# Altium PCB Alpha-1.1.PcbDoc
Units mm, origin at the board's own origin, x right, y up, seen from the top; angles counter-clockwise.
Board outline 50 x 81 mm, 2 copper layers (Top Layer, Bottom Layer), stack 1.671 mm thick; 65 components, 67 nets, 285 pads, 58 vias.
Unrouted connection lines stored in the file: 5.
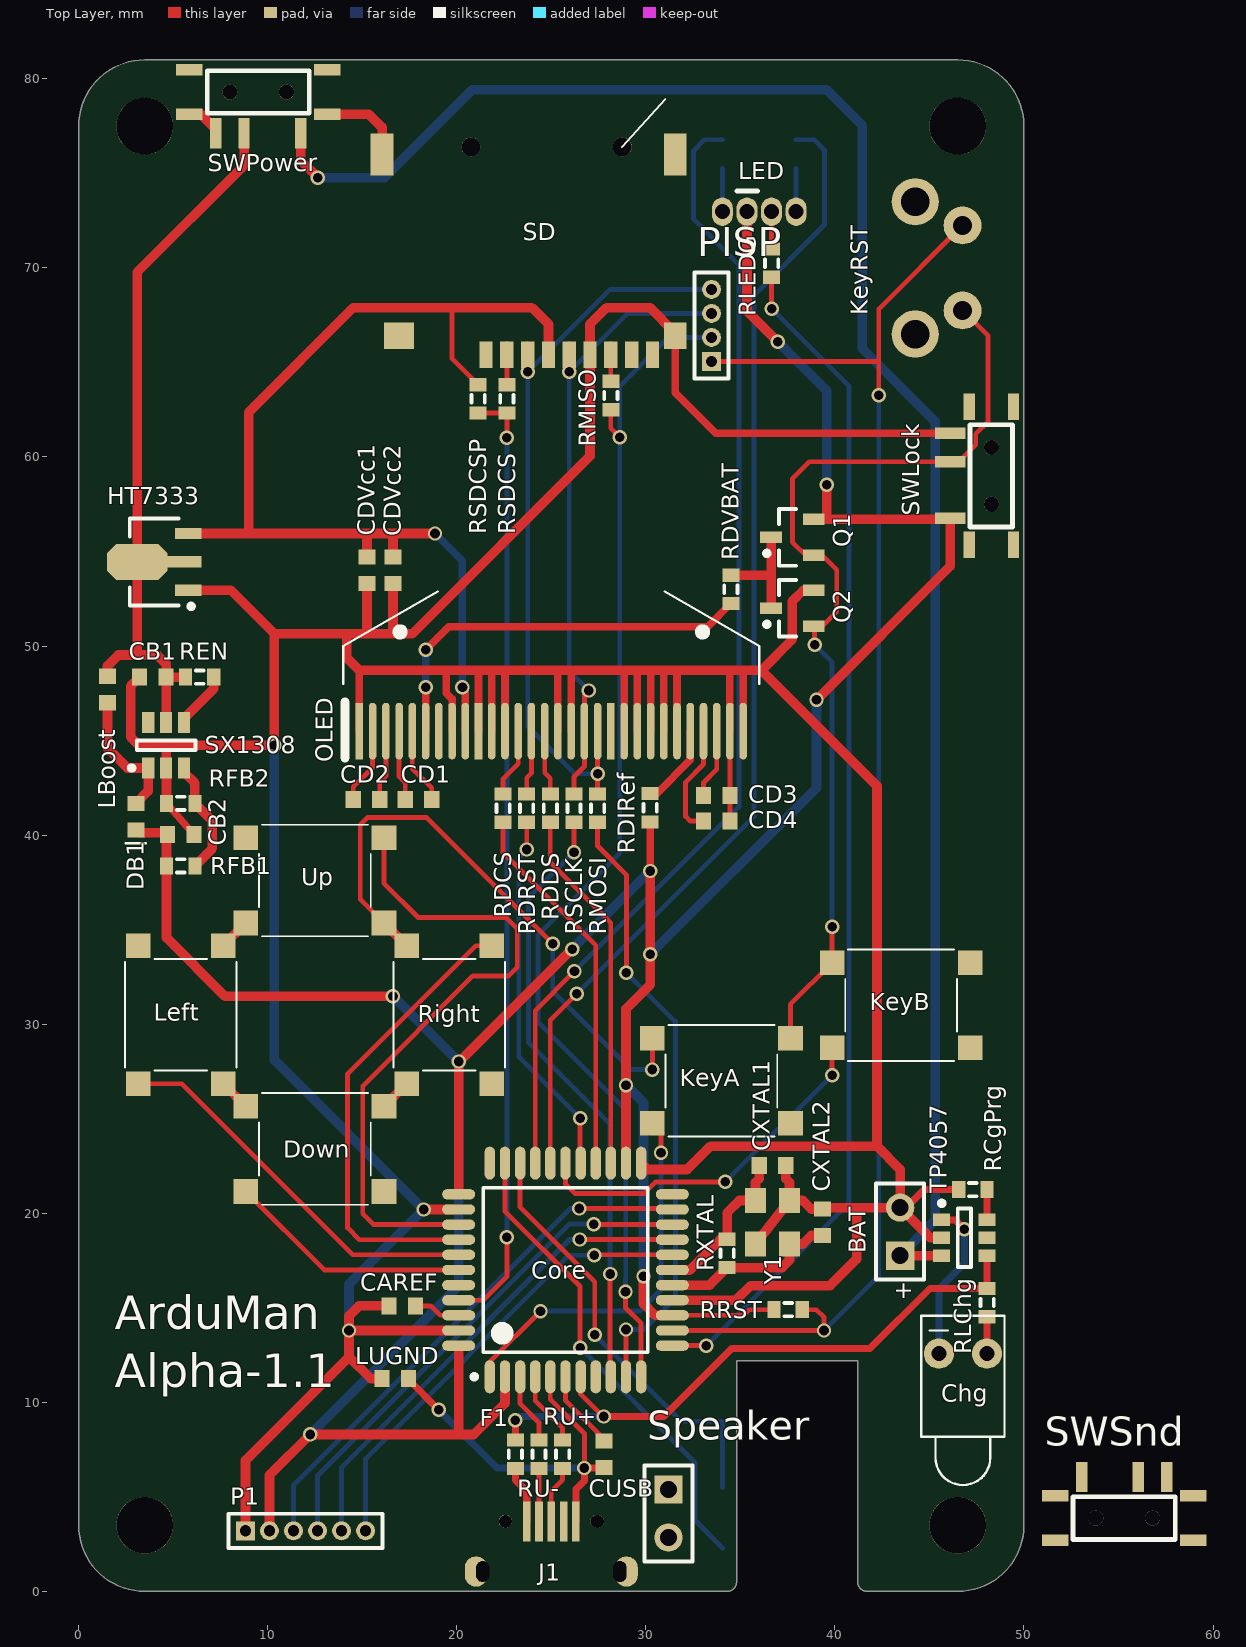
[diagram p0: Top Layer view]
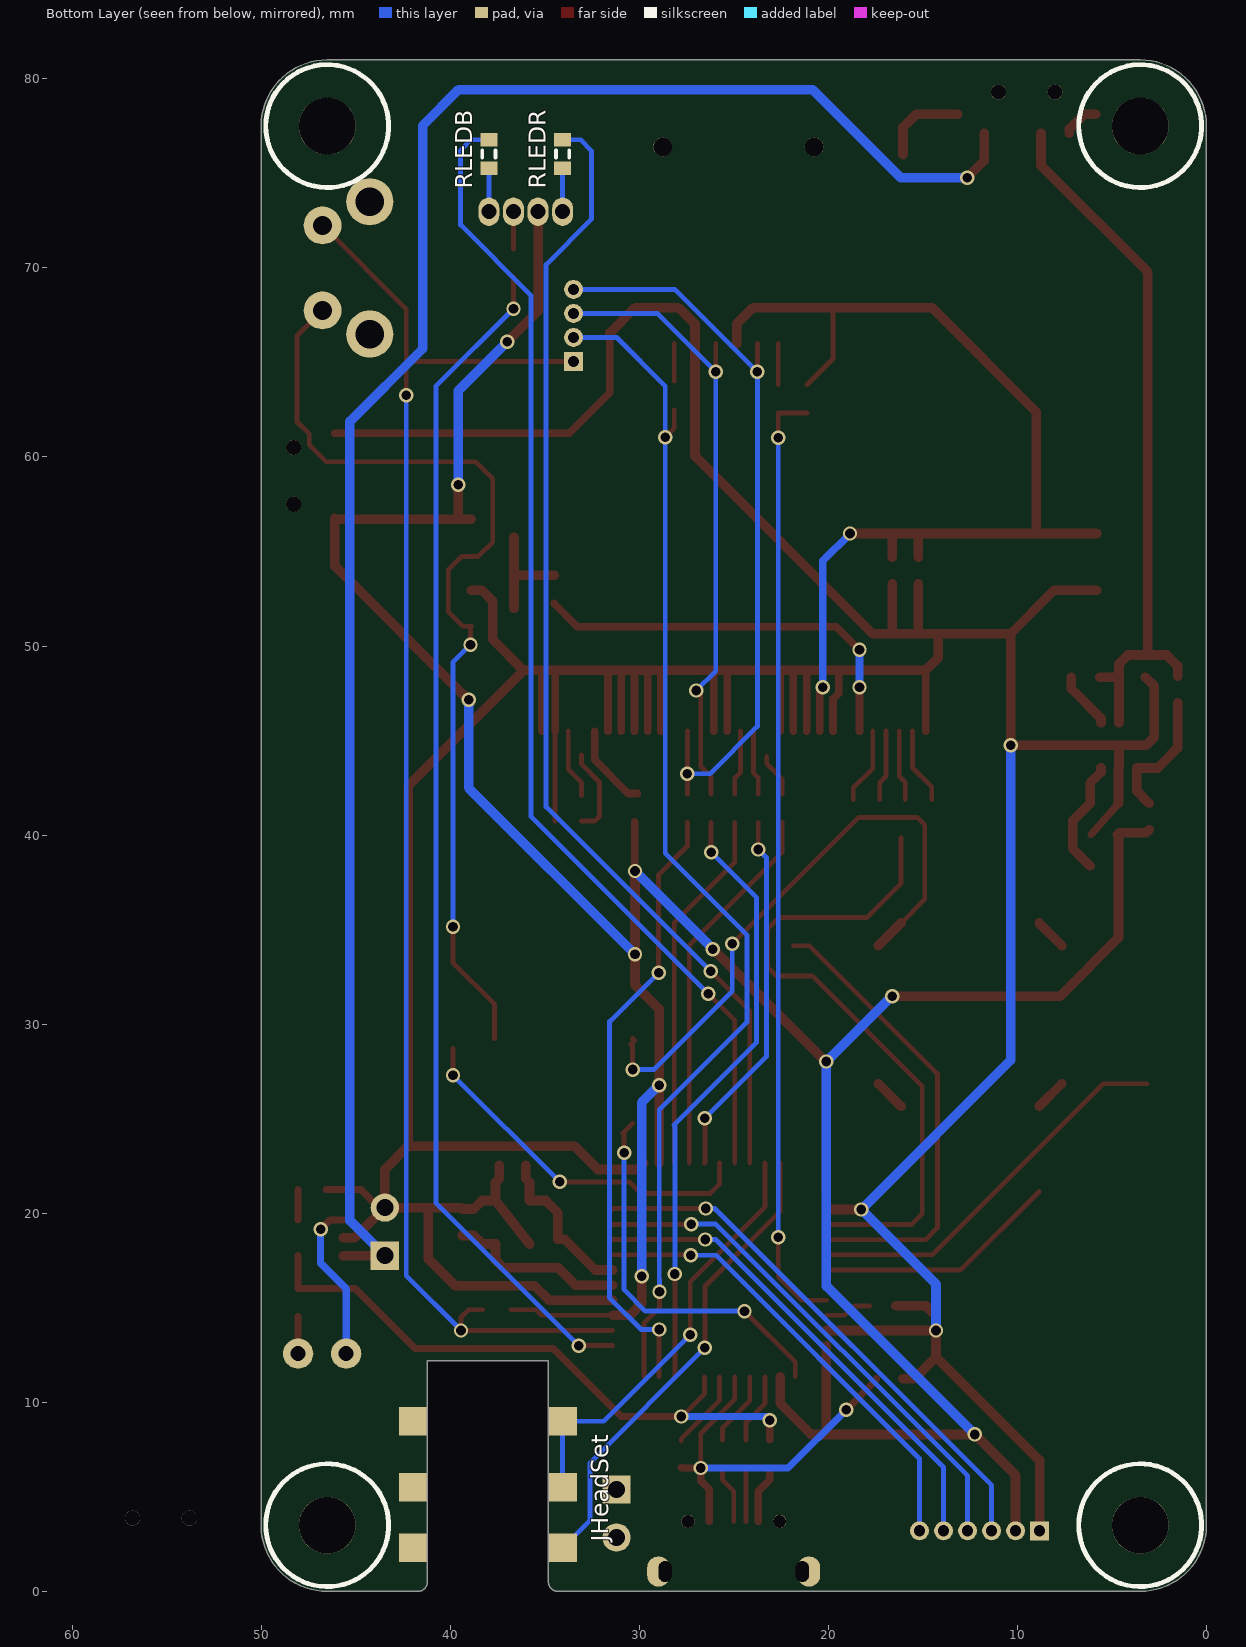
[diagram p1: Bottom Layer view, seen from below]

## Layer stack, top to bottom
Top Solder: solder mask 0.0102, Solder Resist, Dk 3.5
Top Layer: signal copper 0.0356
Dielectric 1: dielectric 1.6, FR-4, Dk 4.8
Bottom Layer: signal copper 0.0356
Bottom Solder: solder mask 0.0102, Solder Resist, Dk 3.5

## Board outline
3.5,0 cw(c3.5,3.5) 0,3.5 0,77.5 cw(c3.5,77.5) 3.5,81 46.5,81 cw(c46.5,77.5) 50,77.5 50,3.5 cw(c46.5,3.5) 46.5,0 41.7,0 cw(c41.7,0.5) 41.2,0.5 41.2,12.2 34.8,12.2 34.8,0.5 cw(c34.3,0.5) 34.3,0

## Design rules (kind name [scope] priority, off if disabled: settings)
Clearance [All] p1: gap=0.254 ignorepadtopadclearanceinfootprint=TRUE except(0: Arc-Hole Track-Hole SMDPad-THPad SMDPad-Hole THPad-Hole Via-Hole Fill-Hole Poly-Hole Region-Hole Text-Hole)
ComponentClearance [All] p1: gap=0 collisioncheckmode=3 verticalgap=0 showdistances=FALSE
HoleSize [All] p1: absolutevalues=TRUE maxlimit=10 minlimit=0.025 maxpercent=80.000 minpercent=20.000
PolygonConnect [All] p1: connectstyle=Relief reliefconductorwidth=0.254 reliefentries=4 polygonreliefangle="90 Angle" airgapwidth=0.254
RoutingVias [All] p1: holewidth=0.711 width=1.27 viastyle="Through Hole" minholewidth=0 minwidth=0.254 maxholewidth=10 maxwidth=10
SolderMaskExpansion [All] p1: expansion=0.102
UnRoutedNet [All] p1: checkbadconnections=TRUE
Width [All] p1: maxlimit=0.762 minlimit=0.254 preferedwidth=0.254
27 further rules are at their usual default settings.

## Components (designator, comment, footprint, x,y, rotation, side; value= is the part's Value field where it differs from the comment)
BAT "Battery" BAT-2 43.45,19.03 r90 top
CAREF "Cap Semi" 1608[0603] 17.125,15.1 r0 top value=100nF
CB1 "Cap Semi" 1608[0603] 3.925,48.35 r0 top value=10~47uF
CB2 "Cap Semi" 1608[0603] 5.4,40.025 r180 top value=4.7+uF
CD1 "Cap Semi" 1608[0603] 17.975,41.875 r180 top value=1uF
CD2 "Cap Semi" 1608[0603] 15.225,41.875 r180 top value=1uF
CD3 "Cap Semi" 1608[0603] 33.75,42.09 r180 top value=2.2uF
CD4 "Cap Semi" 1608[0603] 33.75,40.74 r180 top value=4.7uF
CDVcc1 "Cap Semi" 1608[0603] 15.25,54 r270 top value=1uF
CDVcc2 "Cap Semi" 1608[0603] 16.625,54 r270 top value=1uF
Chg "LED1" LED-1 46.77,12.575 r270 top locked
Core "ATmega32U4-AU" 44ML_N 25.75,17 r90 top locked
CUSB "Cap Semi" 1608[0603] 27.775,7.25 r270 top value=100pF
CXTAL1 "Cap Semi" 1608[0603] 36.7,22.525 r180 top value=22pF
CXTAL2 "Cap Semi" 1608[0603] 39.35,19.525 r270 top value=22pF
DB1 "Diode" D0603 3.025,40.975 r270 top
Down "MicroSwitch" MICROSWITCH 12.5,23.4 r180 top locked
F1 "Fuse 0.5A" J1-0603 23.1,7.25 r90 top value=0.5A
HT7333 "HT7333" SOT89N 4,54.45 r180 top
J1 "USB" USBMICROF 25,3.7 r180 top
JHeadSet "Headset" PJ-313D-2 38,3 r90 bottom locked
KeyA "MicroSwitch" MICROSWITCH 34,27 r180 top locked
KeyB "MicroSwitch" MICROSWITCH 43.5,31 r180 top locked
KeyRST "MicroSwitch" MICROSWITCH-STAND 46.75,70 r90 top
LBoost "Inductor" 1608[0603] 1.525,47.7 r90 top value=47uH
LED "RGB LED" RGBLED 34.05,72.975 r0 top
Left "MicroSwitch" MICROSWITCH 5.4,30.5 r90 top locked
LUGND "Inductor" 1608[0603] 16.75,11.25 r0 top value=31R
OLED "SSD1306" SSD1306 25,45.5 r0 top locked
P1 "MHDR1X6" MHDR1X6 8.825,3.2 r0 top locked
PISP "MHDR1X4" MHDR1X4 33.475,65.05 r90 top
Q1 "MOSFET-P" SOT23_N 37.75,55.75 r180 top locked
Q2 "MOSFET-N" SOT23_N 37.75,52 r180 top locked
RCgPrg "Res3" J1-0603 47.3,21.25 r180 top value=5K
RDCS "Res3" J1-0603 22.45,41.425 r90 top value=1K
RDDS "Res3" J1-0603 24.95,41.425 r90 top value=1K
RDIRef "Res3" J1-0603 30.225,41.45 r90 top value=800K
RDRST "Res3" J1-0603 23.7,41.425 r90 top value=1K
RDVBAT "Res3" J1-0603 34.5,53 r270 top value=1K
REN "Res3" J1-0603 6.4,48.35 r180 top value=100K
RFB1 "Res3" J1-0603 5.4,38.375 r180 top value=200K
RFB2 "Res3" J1-0603 5.4,41.675 r180 top value=27K
Right "MicroSwitch" MICROSWITCH 19.6,30.5 r270 top locked
RLChg "Res3" J1-0603 48.05,15.275 r90 top value=620R
RLEDB "Res3" J1-0603 37.95,76.025 r90 bottom value=3.0K
RLEDG "Res3" J1-0603 36.65,70.25 r270 top value=3.25K
RLEDR "Res3" J1-0603 34.05,76.025 r90 bottom value=1.7K
RMISO "Res3" J1-0603 28.15,63.25 r90 top value=1K
RMOSI "Res3" J1-0603 27.45,41.425 r90 top value=1K
RRST "Res3" J1-0603 37.525,14.9 r0 top value=100K
RSCLK "Res3" J1-0603 26.2,41.425 r90 top value=1K
RSDCS "Res3" J1-0603 22.65,63.075 r270 top value=1K
RSDCSP "Res3" J1-0603 21.125,63.075 r90 top value=100K
RU+ "Res3" J1-0603 25.6,7.25 r90 top value=22R
RU- "Res3" J1-0603 24.35,7.25 r90 top value=22R
RXTAL "Res3" J1-0603 34.3,17.875 r270 top value=1M
SD "HY-TF1007B" HY-TF1007B 30.35,66.7 r180 top locked
Speaker "Header 2" HDR1X2 31.2,5.39 r270 top
SWLock "MSK-1103_W13" MSK-1103_W13 48.275,59 r90 top
SWPower "MSK-1103_W13" MSK-1103_W13 9.5,79.3 r180 top
SWSnd "MSK-1103_W13" MSK-1103_W13 55.3,3.875 r0 top
SX1308 "SX1308" SOT23-6_N 4.625,44.75 r90 top
TP4057 "TP4057" SOT23-6_L 46.85,18.7 r0 top
Up "MicroSwitch" MICROSWITCH 12.5,37.6 r0 top locked
Y1 "Quartz Oscillator" 3225QUARTZ_CRYSTAL 35.8,20.675 r270 top

## Footprints (in the part's own frame and the unit in brackets; to place one, negate y for a bottom-side part, rotate by r counter-clockwise, add the part's x,y. Pads: shape width x height; smd on the part's side, far side on the other; paste and mask are expansions set on the pad)
44ML_N [mm] "Thin QFP, 44-Leads, Body 10x10mm, Pitch 0.8mm, IPC Medium Density"
  oval 1.75x0.55 smd: 1(-5.65,4) 2(-5.65,3.2) 3(-5.65,2.4) 4(-5.65,1.6) 5(-5.65,0.8) 6(-5.65,0) 7(-5.65,-0.8) 8(-5.65,-1.6) 9(-5.65,-2.4) 10(-5.65,-3.2) 11(-5.65,-4) 23(5.65,-4) 24(5.65,-3.2) 25(5.65,-2.4) 26(5.65,-1.6) 27(5.65,-0.8) 28(5.65,0) 29(5.65,0.8) 30(5.65,1.6) 31(5.65,2.4) 32(5.65,3.2) 33(5.65,4)
  oval 0.55x1.75 smd: 12(-4,-5.65) 13(-3.2,-5.65) 14(-2.4,-5.65) 15(-1.6,-5.65) 16(-0.8,-5.65) 17(0,-5.65) 18(0.8,-5.65) 19(1.6,-5.65) 20(2.4,-5.65) 21(3.2,-5.65) 22(4,-5.65) 34(4,5.65) 35(3.2,5.65) 36(2.4,5.65) 37(1.6,5.65) 38(0.8,5.65) 39(0,5.65) 40(-0.8,5.65) 41(-1.6,5.65) 42(-2.4,5.65) 43(-3.2,5.65) 44(-4,5.65)
  silkscreen extent -5.77,-4.35 4.35,4.95, body extent -5,-5 5,5, height 1.2
1608[0603] [mm] "Chip Capacitor, Body 1.6x0.8mm, IPC High Density"
  rect 0.8x0.9 smd: 1(-0.7,0) 2(0.7,0)
  body extent -0.87,-0.48 0.87,0.48, height 1.3
3225QUARTZ_CRYSTAL [mm]
  rect 1.3x1.1 smd: 1(0,0) 2(2.3,0) 3(2.3,1.8) 4(0,1.8)
  body extent -0.45,-0.35 2.75,2.15, height 0.6
BAT-2 [mm] "Battery; 2 Leads"
  rect 1.5x1.5 hole 0.9: 1(-1.27,0)
  round 1.5 hole 0.9: 2(1.27,0)
  silkscreen extent -2.54,-1.27 2.54,1.27
D0603 [mm] "Diode, Body 1.6x0.8mm"
  rect 0.8x0.9 smd: 1(-0.7,0) 2(0.7,0)
  silkscreen extent 1.4,-0.52 1.4,0.53, body extent -0.87,-0.48 0.87,0.48, height 1.3
HDR1X2 [mm] "Connector; Header; 2 Position"
  rect 1.5x1.5 hole 0.9: 1(0,0)
  round 1.5 hole 0.9: 2(2.54,0)
  silkscreen extent -1.27,-1.27 3.81,1.27
HY-TF1007B [mm] "Micro SD Card Slot"
  round 1 hole 1 unplated mask+0: 0(1.6,-9.7) 0(9.6,-9.7)
  rect 0.7x1.4 smd: 1(8.8,1.3) 2(7.7,1.3) 3(6.6,1.3) 4(5.5,1.3) 5(4.4,1.3) 6(3.3,1.3) 7(2.2,1.3) 8(1.1,1.3) 9(0,1.3)
  rect 1.2x1.4 smd: 10(-1.2,0.3)
  rect 1.2x2.2 smd: 10(-1.2,-9.3) 10(14.3,-9.3)
  rect 1.6x1.4 smd: 10(13.4,0.3)
  body extent -0.8,-16.3 13.9,1.3, height 1.85
J1-0603 [mm] "Chip Resistor, Body 1.6x0.8mm, IPC High Density"
  rect 0.7x0.9 smd: 1(-0.75,0) 2(0.75,0)
  silkscreen extent -0.2,-0.35 0.2,0.35, body extent -0.85,-0.48 0.85,0.48, height 0.9
LED-1 [mm] "LED; 2 Leads"
  round 1.6 hole 0.8: 1(0,1.27) 2(0,-1.27)
  silkscreen extent -2,-2.2 6.95,2.2
MHDR1X4 [mm] "Connector; Header; 4 Position"
  rect 1x1 hole 0.6: 1(0,0)
  round 1 hole 0.6: 2(1.27,0) 3(2.54,0) 4(3.81,0)
  silkscreen extent -0.9,-0.9 4.71,0.9
MHDR1X6 [mm] "Connector; Header; 6 Position"
  rect 1x1 hole 0.6: 1(0,0)
  round 1 hole 0.6: 2(1.27,0) 3(2.54,0) 4(3.81,0) 5(5.08,0) 6(6.35,0)
  silkscreen extent -0.9,-0.9 7.25,0.9
MICROSWITCH [mm] "Micro Switch"
  rect 1.3x1.3 smd: 1(-3.65,2.25) 1(3.65,2.25) 2(-3.65,-2.25) 2(3.65,-2.25)
  silkscreen extent -2.95,-2.95 2.95,2.95, body extent -4,-3 4,3, height 6
MICROSWITCH-STAND [mm] "Micro Switch, Standing"
  round 2.5 hole 1.5: 0(-3.5,2.5) 0(3.5,2.5)
  round 2 hole 1: 1(-2.25,0) 2(2.25,0)
  body extent -4.25,-5 4.25,4.45, height 7
MSK-1103_W13 [mm] "Switch"
  round 0.8 hole 0.8 unplated mask+0: 0(-1.5,0) 0(1.5,0)
  rect 0.6x1.6 smd: 1(-2.25,2.175) 2(0.75,2.175) 3(2.25,2.175)
  rect 1.4x0.6 smd: 4(-3.65,-1.175) 4(-3.65,1.175) 4(3.65,-1.175) 4(3.65,1.175)
  silkscreen extent -2.7,-1.12 2.7,1.12, body extent -3.9,-3.88 3.9,2.37, height 1.4
PJ-313D-2 [mm] "Headphone Jack"
  rect 1.5x1.5 smd: 1(6,-3.95) 1(6,3.95) 2(2.5,-3.95) 2(2.5,3.95) 3(-0.7,-3.95) 3(-0.7,3.95)
  body extent -5,-4.2 9,4.2, height 5
RGBLED [mm] "RGB LED"
  oval 1.1x1.5 hole 0.8: 1(0,0) 2(1.3,0) 3(2.6,0) 4(3.9,0)
  silkscreen extent 0.77,1.1 1.85,1.1
SOT23-6_L [mm] "SOT23, 6-Leads, Body 2.9x1.6mm, Pitch 0.95mm, Lead Span 2.7mm, IPC High Density"
  rect 0.9x0.65 smd: 1(-1.2,0.95) 2(-1.2,0) 3(-1.2,-0.95) 4(1.2,-0.95) 5(1.2,0) 6(1.2,0.95)
  silkscreen extent -1.32,-1.55 0.35,1.95, body extent -0.9,-1.55 0.9,1.55, height 1.45
SOT23-6_N [mm] "SOT23, 6-Leads, Body 2.9x1.6mm, Pitch 0.95mm, Lead Span 2.7mm, IPC Medium Density"
  rect 1.1x0.65 smd: 1(-1.2,0.95) 2(-1.2,0) 3(-1.2,-0.95) 4(1.2,-0.95) 5(1.2,0) 6(1.2,0.95)
  silkscreen extent -1.32,-1.55 0.25,1.95, body extent -0.9,-1.55 0.9,1.55, height 1.45
SOT23_N [mm] "SOT23, 3-Leads, Body 2.9x1.3mm, Pitch 0.95mm, Lead Span 2.3mm - Reverse Pinning, IPC Medium Density"
  rect 1.15x0.6 smd: 1(1.125,0) 2(-1.125,-0.95) 3(-1.125,0.95)
  silkscreen extent -0.2,-1.5 1.47,1.5, body extent -0.7,-1.5 0.7,1.5, height 1.1
SOT89N [mm] "SOT89, 3-Leads, Body 4.5x2.4 mm, Pitch 1.5mm, Lead Span 4.1mm, IPC Medium Density"
  rect 1.4x0.6 smd: 1(-1.8,1.5) 3(-1.8,-1.5)
  rect 1.8x0.6 smd: 2(-1.6,0)
  oct 3.2x1.9 smd: 2(0.9,0)
  silkscreen extent -2.07,-2.3 1.3,2.47, body extent -1.3,-2.3 1.3,2.3, height 1.6
SSD1306 [mm] "OLED Controller"
  rect 0.4x3 smd: 1(-10.15,0) 10(-3.85,0) 20(3.15,0)
  oval 0.4x3 smd: 2(-9.45,0) 3(-8.75,0) 4(-8.05,0) 5(-7.35,0) 6(-6.65,0) 7(-5.95,0) 8(-5.25,0) 9(-4.55,0) 11(-3.15,0) 12(-2.45,0) 13(-1.75,0) 14(-1.05,0) 15(-0.35,0) 16(0.35,0) 17(1.05,0) 18(1.75,0) 19(2.45,0) 21(3.85,0) 22(4.55,0) 23(5.25,0) 24(5.95,0) 25(6.65,0) 26(7.35,0) 27(8.05,0) 28(8.75,0) 29(9.45,0) 30(10.15,0)
  silkscreen extent -11,-1.4 11,7.39
USBMICROF [mm] "USB Micro Slot Female"
  rrect100% 1.2x1.6 hole 0.7 slot 1.1 at 90 deg copper offset -0.35,0: 0(-3.625,2.65)
  round 0.7 hole 0.7 mask+0: 0(-2.425,0) 0(2.425,0)
  rrect100% 1.2x1.6 hole 0.7 slot 1.1 at 90 deg copper offset 0.35,0: 0(3.625,2.65)
  rect 0.4x2.1 smd: 1(1.3,0) 2(0.65,0) 3(0,0) 4(-0.65,0) 5(-1.3,0)
  body extent -3.8,-0.26 3.8,4.8, height 2.6

## Part data
CAREF CB1 CB2 CD1 CD2 CD3 CD4 CDVcc1 CDVcc2 CUSB CXTAL1 CXTAL2: "Capacitor (Semiconductor SIM Model)", LatestRevisionDate=29-May-2009, LatestRevisionNote="IPC-7351 Footprint Added.", PackageDescription="Chip Capacitor", PackageReference=C1206, Published=8-Jun-2000, Publisher="Altium Limited"
Chg: "Typical RED GaAs LED", LatestRevisionDate=08-Jul-2005, LatestRevisionNote="Mech Layer 1 removed.", PackageDescription="LED; 2 Leads", PackageReference=LED-1, Published=8-Jun-2000, Publisher="Altium Limited"
Core: "8-bit AVR Microcontroller, 2.7-5.5V, 32KB Flash, 2.5KB EEPROM, 1KB SRAM, USB Controller, 44-pin TQFP, Industrial Grade (-40癈 to 85癈)", Supplier Part Number 1=ATMEGA32U4-AU-ND, ComponentLink1Description="Manufacturer Link", ComponentLink1URL=http://www.atmel.com/products/avr/default.asp?, ComponentLink2Description="ATmega16U4/32U4 Datasheet", ComponentLink2URL=http://www.atmel.com/dyn/resources/prod_documents/doc7766.pdf, ComponentLink3Description="ATmega16U4 ATmega32U4 Summary", ComponentLink3URL=http://www.atmel.com/dyn/resources/prod_documents/7766S.pdf, ComponentLink4Description="Atmel.com Home", ComponentLink4URL=http://www.atmel.com, DatasheetVersion="revD, Jan-2009", PackageDescription="44-Pin Plastic Thin Quad Flat Pack, 10 x 10 x 1.0 mm Body, 0.8 mm Pitch (TQFP)", PackageReference=44ML, PackageVersion="rev.G, Jul-2007", Published=1-Apr-2010, Publisher="Altium Limited", Supplier 1=Digi-Key, Supplier 2=Farnell, Supplier 3=Mouser, Supplier Part Number 2=1748525, Supplier Part Number 3=556-ATMEGA32U4-AU
DB1: "Default Diode", Code_JEDEC=DO-214-AB, LatestRevisionDate=17-Jul-2002, LatestRevisionNote="Re-released for DXP Platform.", PackageDescription="DO-214-AB/SMC; 2 C-Bend Leads; Body 7.9 x 5.9 mm, inc. leads (LxW)", PackageReference=SMC, PackageVersion=Sep-1996, Published=8-Jun-2000, Publisher="Altium Limited"
Down KeyA KeyB KeyRST Left Right Up: "Micro Switch"
F1: library part Res3, "Fuse", LatestRevisionDate=29-May-2009, LatestRevisionNote="IPC-7351 Footprint Added.", PackageDescription="Chip Resistor", PackageReference=J1-0603, Published=8-Jun-2000, Publisher="Altium Limited"
HT7333: "3.3v LDO Regulator"
J1: library part USBMicroF, "USB Micro Female Jack"
JHeadSet: library part PJ-313D, "3.5mm Headset Jack"
LED: library part RGBLED
OLED: "OLED Controller"
P1: "Header, 6-Pin", LatestRevisionDate=17-Jul-2002, LatestRevisionNote="Re-released for DXP Platform.", Publisher="Altium Limited"
PISP: "Header, 4-Pin", LatestRevisionDate=17-Jul-2002, LatestRevisionNote="Re-released for DXP Platform.", Publisher="Altium Limited"
Q1: "P-Channel MOSFET", LatestRevisionDate=17-Jul-2002, LatestRevisionNote="Re-released for DXP Platform.", PackageDescription="TO, Flat Index; 3 In-Line, Axial Leads; Body Dia. 4.6mm; Lead Dia. 0.5 mm (max)", PackageReference=E3, PackageVersion=1995/1996, Published=8-Jun-2000, Publisher="Altium Limited"
Q2: "N-Channel MOSFET", LatestRevisionDate=17-Jul-2002, LatestRevisionNote="Re-released for DXP Platform.", PackageDescription="TO, Flat Index; 3 In-Line, Axial Leads; Body Dia. 4.6mm; Lead Dia. 0.5 mm (max)", PackageReference=E3, PackageVersion=1995/1996, Published=8-Jun-2000, Publisher="Altium Limited"
RCgPrg RDCS RDDS RDIRef RDRST RDVBAT REN RFB1 RFB2 RLChg RLEDB RLEDG RLEDR RMISO RMOSI RRST RSCLK RSDCS RSDCSP RU+ RU- RXTAL: "Resistor", LatestRevisionDate=29-May-2009, LatestRevisionNote="IPC-7351 Footprint Added.", PackageDescription="Chip Resistor", PackageReference=J1-0603, Published=8-Jun-2000, Publisher="Altium Limited"
SD: "Micro SD Card Slot"
Speaker: "Header, 2-Pin", LatestRevisionDate=17-Jul-2002, LatestRevisionNote="Re-released for DXP Platform.", Publisher="Altium Limited"
SWLock SWPower SWSnd: "Switch"
SX1308: "Boost DC-DC"
Y1: library part OSC3225
LBoost LUGND: Code_IEC=1005, Code_JEITA=0402, LatestRevisionDate=29-May-2009, LatestRevisionNote="IPC-7351 Footprint Added.", PackageDescription="Chip Inductor", PackageReference=0402-A, Published=8-Jun-2000, Publisher="Altium Limited"

## Free pads (board coordinates)
  round 3 hole 3 unplated mask+0: 0(3.5,3.5) 0(3.5,77.5) 0(46.5,3.5) 0(46.5,77.5)

## Via types
v1: diameter 0.762, hole 0.508, Top Layer to Bottom Layer, tented both sides, 58 vias

## Nets (pads, with @x,y where several pads share a name; then routed paths per layer and width w, separated by ;. In a path a pad name is that pad's centre, name@x,y a point inside that pad or via, vN(x,y) a via of type N, cw(c..) or ccw(c..) an arc to the next point about the centre after c; other vN are vias at no path point)
Bat+: BAT.1 SWPower.1 TP4057.3 | length 98.6
  Top Layer w0.254: BAT.1 BAT.1@43.46,17.75
  Top Layer w0.508: SWPower.1 11.75,75.675 v1(12.65,74.775) ; BAT.1@43.46,17.75 TP4057.3
  Bottom Layer w0.508: v1(12.65,74.775) 16.175,74.775 20.825,79.425 39.55,79.425 41.45,77.525 41.45,65.725 45.3,61.875 45.3,19.61 BAT.1
DPad-Down: Core.39 Down.1 | length 13
  Top Layer w0.254: Down.1@8.85,21.15 13,17 Core.39
DPad-Left: Core.38 Left.1 | length 20.7
  Top Layer w0.254: Left.1@3.15,26.85 5.45,26.85 14.5,17.8 Core.38
DPad-Right: Core.37 Right.1 | length 24.7
  Top Layer w0.254: Core.37 14.85,18.6 14.225,19.225 14.225,27.375 21,34.15 Right.1@21.85,34.15
DPad-Up: Core.36 Up.1 | length 35.3
  Top Layer w0.254: Up.1@16.15,39.85 16.15,37.45 17.95,35.65 22.6,35.65 23.2,35.05 23.2,33 22.75,32.55 20.85,32.55 15.025,26.725 15.025,19.975 15.6,19.4 Core.36
GND: BAT.2 CAREF.1 CB1.1 CB2.1 CD3.1 CD4.1 CDVcc1.2 CDVcc2.2 Core.15 Core.23 Core.35 Core.43 CXTAL1.1 CXTAL2.1 HT7333.1 LUGND.1 OLED.1 OLED.8 OLED.10 OLED.11 OLED.12 OLED.16 OLED.17 OLED.21 OLED.22 OLED.23 OLED.24 OLED.25 OLED.29 OLED.30 P1.1 Q2.2 RCgPrg.2 RFB2.2 SD.6 SD.10 SWLock.3 SWPower.3 SWPower.4 SX1308.2 TP4057.2 Y1.2 Y1.4 | length 307.3
  Top Layer w0.254: SWPower.3@7.219,77.156 SWPower.3 ; CD4.1 CD3.1 OLED.29
  Top Layer w0.381: RFB2.2 CB2.1 ; BAT.2 43.775,20.3 44.725,21.25 RCgPrg.2
  Top Layer w0.4: OLED.1 14.85,48.716 ; 19.454,48.662 19.454,47.494 19.75,47.198 OLED.8 ; OLED.10 21.15,48.716 ; OLED.11 21.85,48.716 ; OLED.12 22.55,48.716 ; OLED.16 25.35,48.716 ; OLED.17 26.05,48.716 ; OLED.21 28.85,48.716 ; OLED.22 29.55,48.716 ; OLED.23 30.25,48.716 ; OLED.24 30.95,48.716 ; SD.10@31.55,66.4 31.55,63.4 33.7,61.25 SWLock.3 ; OLED.25 31.65,48.716 ; OLED.29 34.45,48.716 ; OLED.30 35.15,48.716
  Top Layer w0.508: CB1.1 2.75,47.875 2.75,45.2 3.2,44.75 4.625,44.75 ; SX1308.2 4.625,44.75 ; RFB2.2 SX1308.2@4.65,43.525 ; HT7333.1 8.05,52.95 10.35,50.65 ; SWPower.4@5.85,78.125 6.475,78.125 7.25,77.35 SWPower.3 ; P1.1 8.825,6.925 14.3,12.4 ; SWPower.4@13.15,78.125 15.35,78.125 16.05,77.425 SD.10@16.05,76 ; CDVcc1.2 15.25,50.65 ; LUGND.1 15.45,11.25 14.3,12.4 ; CAREF.1 14.825,15.1 14.3,14.575 v1(14.3,13.8) ; CDVcc2.2 16.625,50.65 ; v1(18.25,20.2) Core.35 ; 19.454,48.662 19.508,48.716 ; Core.43 v1(14.3,13.8) ; Core.23 30.088,22.312 32.187,22.312 33.425,23.55 42.225,23.55 ; Core.15 34.775,15.4 35.55,16.175 39.75,16.175 41.15,17.575 41.15,20.3 ; SD.10@31.55,66.4 31.55,66.568 30.218,67.9 27.925,67.9 27.05,67.025 SD.6 27.05,60.05 17.65,50.65 16.625,50.65 ; Y1.2 Y1.4 ; CXTAL1.1 37.4,21.825 37.6,21.625 Y1.4 ; Q2.2 38.325,52.95 37.75,52.375 37.75,50.358 36.109,48.716 ; TP4057.2 45.05,18.7 BAT.2 ; 4.625,44.75 v1(10.35,44.75) 10.35,50.65 ; 10.35,50.65 14.175,50.65 ; 14.175,50.65 14.175,49.391 14.85,48.716 19.508,48.716 ; 14.175,50.65 15.25,50.65 ; 14.3,12.4 v1(14.3,13.8) ; 15.25,50.65 16.625,50.65 ; 19.508,48.716 21.15,48.716 21.85,48.716 22.55,48.716 25.35,48.716 26.05,48.716 28.85,48.716 29.55,48.716 30.25,48.716 30.95,48.716 31.65,48.716 34.45,48.716 35.15,48.716 36.109,48.716 ; 36.109,48.716 42.225,42.6 42.225,23.55 ; Y1.4 38.3,20.675 38.75,20.225 CXTAL2.1 39.425,20.3 41.15,20.3 ; 41.15,20.3 BAT.2 ; 42.225,23.55 43.45,22.325 BAT.2
  Bottom Layer w0.508: v1(10.35,44.75) 10.35,28.1 v1(18.25,20.2) 14.3,16.25 v1(14.3,13.8)
GND-LOCK: Down.2 KeyA.2 KeyB.2 KeyRST.1 Left.2 Q1.3 Q2.3 Right.2 SWLock.2 Up.2 | length 88.5
  Top Layer w0.254: Up.2@16.15,35.35 14.9,36.6 14.9,40.55 15.275,40.925 18.403,40.925 v1(25.076,34.252) ; v1(30.35,27.6) 30.35,28.85 30.45,28.95 30.25,29.15 KeyA.2@30.35,29.25 ; KeyA.2@37.65,29.25 37.65,31.05 39.85,33.25 v1(39.85,35.15) ; v1(38.925,50.075) 38.925,51 Q2.3 39.325,51.05 40.1,51.825 40.1,54.025 39.388,54.737 38.513,54.737 37.75,55.5 37.75,58.85 38.65,59.75 SWLock.2 46.55,59.75 47.45,60.65 47.45,61.225 48.1,61.875 48.1,66.4 KeyRST.1
  Top Layer w0.508: Left.2@7.65,26.85 Down.2@8.85,25.65 ; Left.2@7.65,34.15 Up.2@8.85,35.35 ; Down.2@16.15,25.65 Right.2@17.35,26.85 ; Up.2@16.15,35.35 Right.2@17.35,34.15
  Bottom Layer w0.254: v1(25.076,34.252) 25.076,31.749 29.225,27.6 v1(30.35,27.6) ; v1(38.925,50.075) 39.85,49.15 v1(39.85,35.15)
Key-A: Core.1 KeyA.1 | length 20.5
  Top Layer w0.254: Core.1 21.75,12.145 v1(24.43,14.825) ; KeyA.1@30.35,24.75 30.85,24.25 30.8,24.2 30.802,24.199 v1(30.802,23.201)
  Bottom Layer w0.254: v1(24.43,14.825) 29.675,14.825 30.802,15.952 v1(30.802,23.201)
Key-B: Core.28 KeyB.1 | length 19.4
  Top Layer w0.254: Core.28 25.75,21.55 26.25,21.05 29.922,21.05 30.528,21.656 v1(34.206,21.656) ; v1(39.85,27.3) KeyB.1@39.85,28.711
  Bottom Layer w0.254: v1(34.206,21.656) v1(39.85,27.3)
LED-Blue: Core.29 RLEDB.2 | length 61.3
  Top Layer w0.254: Core.29 24.95,30.215 v1(26.35,31.615)
  Bottom Layer w0.254: v1(26.35,31.615) 35.725,40.99 35.725,68.55 39.45,72.275 39.45,76.225 38.9,76.775 RLEDB.2
LED-Green: Core.12 RLEDG.2 | length 63.7
  Top Layer w0.254: Core.12 31.425,12.975 31.45,13 v1(33.2,13) ; 36.65,68.375 v1(36.65,67.85) RLEDG.2
  Bottom Layer w0.254: v1(33.2,13) 40.75,20.55 40.75,63.75 v1(36.65,67.85)
LED-Red: Core.30 RLEDR.2 | length 60.8
  Top Layer w0.254: Core.30 24.15,30.715 v1(26.225,32.79)
  Bottom Layer w0.254: v1(26.225,32.79) 34.925,41.49 34.925,70.175 32.525,72.575 32.525,76.2 33.1,76.775 RLEDR.2
MISO: Core.11 PISP.2 RMISO.1 | length 64.6
  Top Layer w0.254: RMISO.1 28.15,61.525 v1(28.625,61.05) ; v1(28.925,15.85) 28.925,15 29.75,14.175 Core.11
  Bottom Layer w0.254: v1(28.925,15.85) 28.925,16.497 28.937,16.509 28.937,25.463 24.3,30.1 24.3,34.725 28.625,39.05 v1(28.625,61.05) ; PISP.2 31.195,66.32 28.625,63.75 v1@28.625,61.3 ; v1(28.625,61.05) 28.375,61.05 v1@28.625,61.3 ; v1(28.625,61.05) v1@28.625,61.3
MISO_R: RMISO.2 SD.7 | length 2
  Top Layer w0.254: RMISO.2 SD.7@28.15,66
MOSI: Core.10 RMOSI.1 | length 32.7
  Top Layer w0.254: RMOSI.1 27.45,39.425 28.975,37.9 v1(28.975,32.725) ; Core.10 v1(28.95,13.85)
  Bottom Layer w0.254: v1(28.95,13.85) 29.9,13.85 31.564,15.514 31.564,30.136 v1(28.975,32.725)
MOSI_R: OLED.19 PISP.4 RMOSI.2 SD.3 | length 39.8
  Top Layer w0.254: v1(23.75,64.5) SD.3 SD.3@23.75,66 ; RMOSI.2 OLED.19
  Bottom Layer w0.254: v1(27.45,43.25) 26.25,43.25 23.75,45.75 v1(23.75,64.5) 28.11,68.86 PISP.4
NetCAREF_2: CAREF.2 Core.42 | length 2.5
  Top Layer w0.254: CAREF.2 18.625,15.1 19.125,14.6 Core.42
NetCD1_1: CD1.1 OLED.5 | length 4
  Top Layer w0.254: OLED.5 17.65,43.518 18.675,42.493 CD1.1
NetCD1_2: CD1.2 OLED.4 | length 3.8
  Top Layer w0.254: OLED.4 16.95,43.1 17.275,42.775 CD1.2
NetCD2_1: CD2.1 OLED.3 | length 3.8
  Top Layer w0.254: CD2.1 15.925,42.8 16.25,43.125 OLED.3
NetCD2_2: CD2.2 OLED.2 | length 4
  Top Layer w0.254: CD2.2 14.525,42.55 15.55,43.575 OLED.2
NetCD3_2: CD3.2 OLED.28 | length 3.7
  Top Layer w0.254: CD3.2 33.05,42.775 33.75,43.475 OLED.28
NetCD4_2: CD4.2 OLED.27 | length 4.7
  Top Layer w0.254: CD4.2 32.35,40.74 32.1,40.99 32.1,42.8 33.05,43.75 OLED.27@33.05,44.24
NetChg_1: Chg.1 RLChg.1 | length 1.9
  Top Layer w0.381: Chg.1@48.05,12.585 RLChg.1
NetChg_2: Chg.2 TP4057.1 | length 8.5
  Top Layer w0.381: TP4057.1 46.35,19.65 v1(46.85,19.15)
  Bottom Layer w0.381: Chg.2 45.5,16 46.85,17.35 v1(46.85,19.15)
NetCore_16: Core.16 CXTAL2.2 RXTAL.2 Y1.3 | length 9.5
  Top Layer w0.508: Core.16 33.375,16.2 RXTAL.2 37.2,17.125 37.6,17.525 Y1.3 38.3,18.375 38.75,18.825 CXTAL2.2
NetCore_17: Core.17 CXTAL1.2 RXTAL.1 Y1.1 | length 8.7
  Top Layer w0.508: Core.17 32.325,17 33.95,18.625 RXTAL.1 34.3,20.025 34.95,20.675 Y1.1 35.8,21.625 36,21.825 CXTAL1.2
NetDB1_1: DB1.1 LBoost.1 SX1308.1 | length 7.1
  Top Layer w0.508: LBoost.1 1.525,44.6 2.575,43.55 SX1308.1 3.675,42.325 DB1.1
NetF1_1: F1.1 J1.1 | length 3
  Top Layer w0.381: F1.1 23.1,5.9 23.7,5.3 J1.1
NetJ1_2: J1.2 RU-.1 | length 2.8
  Top Layer w0.254: J1.2 RU-.1
NetJ1_3: J1.3 RU+.1 | length 3
  Top Layer w0.254: J1.3 25,5.3 25.6,5.9 RU+.1
NetJHeadSet_1: JHeadSet.1 JHeadSet.2 SWSnd.3
NetLED_1: LED.1 RLEDR.1 | length 2.3
  Bottom Layer w0.254: LED.1 RLEDR.1
NetLED_3: LED.3 RLEDG.1 | length 4
  Top Layer w0.254: RLEDG.1 LED.3 RLEDG.1
NetLED_4: LED.4 RLEDB.1 | length 2.3
  Bottom Layer w0.254: LED.4 RLEDB.1
NetOLED_6: OLED.6 RDVBAT.2 | length 21.5
  Top Layer w0.4: OLED.6 v1(18.35,47.825) ; v1(18.35,49.8) 19.575,51.025 33.275,51.025 RDVBAT.2
  Bottom Layer w0.4: v1(18.35,47.825) v1(18.35,49.8)
NetOLED_13: OLED.13 RDCS.2 | length 2.3
  Top Layer w0.254: RDCS.2@22.45,42.165 22.45,42.975 23.25,43.775 OLED.13@23.25,44.165
NetOLED_14: OLED.14 RDRST.2 | length 3.4
  Top Layer w0.254: RDRST.2@23.7,42.165 23.7,43.025 23.95,43.275 OLED.14
NetOLED_15: OLED.15 RDDS.2 | length 3.5
  Top Layer w0.254: OLED.15 24.65,43.3 24.95,43 RDDS.2@24.95,42.165
NetOLED_26: OLED.26 RDIRef.2 | length 4.5
  Top Layer w0.4: RDIRef.2@30.1,42.2 30.575,42.2 32.35,43.975 OLED.26
NetRCgPrg_1: RCgPrg.1 TP4057.6 | length 1.6
  Top Layer w0.381: TP4057.6 RCgPrg.1
NetREN_1: REN.1 SX1308.4 | length 3.1
  Top Layer w0.508: SX1308.4 5.575,46.175 7.15,47.75 REN.1
NetRFB1_1: RFB1.1 RFB2.1 SX1308.3 | length 6.2
  Top Layer w0.508: SX1308.3 5.575,43.325 6.15,42.75 RFB2.1 7.075,40.75 7.075,39.3 RFB1.1
NetRSDCS_1: RSDCS.1 SD.2 | length 2.2
  Top Layer w0.254: RSDCS.1 SD.2@22.65,66
NetSpeaker_1: Speaker.1 SWSnd.1
OLED-CS: Core.26 RDCS.1 | length 20
  Top Layer w0.254: RDCS.1@22.45,40.665 22.45,39.065 27.35,34.165 Core.26
OLED-DS: Core.25 RDDS.1 | length 19.3
  Top Layer w0.254: RDDS.1@24.95,40.665 24.95,38.565 28.15,35.365 Core.25
OLED-POWER: Q1.1 Q2.1 RDVBAT.1 | length 5.9
  Top Layer w0.508: RDVBAT.1 36.625,53.75 ; Q2.1 36.625,53.75 ; Q1.1 36.625,53.75
OLED-RST: Core.27 RDRST.1 | length 19.5
  Top Layer w0.254: v1(23.7,39.24) RDRST.1@23.7,40.665 ; v1(26.525,25.025) 26.525,22.675 Core.27
  Bottom Layer w0.254: v1(23.7,39.24) 23.275,38.815 23.275,28.275 v1(26.525,25.025)
RST: Core.13 KeyRST.2 PISP.1 RRST.2 | length 80.4
  Top Layer w0.254: Core.13 v1(39.425,13.8) 39.425,14.5 39.025,14.9 RRST.2 ; PISP.1 42.319,65.05 ; v1(42.319,63.256) 42.319,65.05 ; KeyRST.2 42.319,67.819 42.319,65.05
  Bottom Layer w0.254: v1(39.425,13.8) 42.319,16.694 v1(42.319,63.256)
SCLK: Core.9 RSCLK.1 | length 32.2
  Top Layer w0.254: v1(26.2,39.1) RSCLK.1 ; v1(28.113,16.788) 28.113,11.387 Core.9
  Bottom Layer w0.254: v1(26.2,39.1) 23.792,36.692 23.792,29.033 28.175,24.65 28.113,24.588 v1(28.113,16.788)
SCLK_R: OLED.18 PISP.3 RSCLK.2 SD.5 | length 33.4
  Top Layer w0.254: v1(25.95,64.5) SD.5@25.95,66 ; RSCLK.2 26.2,43.078 26.75,43.628 OLED.18 26.75,47.425 v1(26.975,47.65)
  Bottom Layer w0.254: v1(26.975,47.65) 25.95,48.675 v1(25.95,64.5) 29.04,67.59 PISP.3
SD-CS: Core.41 RSDCS.2 RSDCSP.1 | length 50.3
  Top Layer w0.254: Core.41 21.4,15.4 22.65,16.65 v1(22.65,18.725) ; RSDCSP.1 RSDCS.2 v1(22.65,61.025)
  Bottom Layer w0.254: v1(22.65,18.725) v1(22.65,61.025)
Serial-RX: Core.20 P1.4 | length 27.2
  Top Layer w0.254: v1(27.25,19.425) 27.275,19.4 Core.20
  Bottom Layer w0.254: P1.4 12.635,6.11 25.95,19.425 v1(27.25,19.425)
Serial-TX: Core.21 P1.3 | length 28.5
  Top Layer w0.254: v1(26.475,20.25) 31.35,20.25 Core.21
  Bottom Layer w0.254: P1.3 11.365,5.615 26,20.25 v1(26.475,20.25)
Speaker-1: Core.31 SWSnd.2 | length 22.9
  Top Layer w0.254: Core.31 23.35,20.325 27.301,16.374 v1(27.301,13.576)
  Bottom Layer w0.254: v1(27.301,13.576) 31.877,9 34.05,9 34.05,5.5
Speaker-2: Core.32 JHeadSet.3 Speaker.2 | length 25.1
  Top Layer w0.254: Core.32 22.55,20.1 26.525,16.125 v1(26.525,12.876)
  Bottom Layer w0.254: v1(26.525,12.876) 32.6,6.801 32.6,3.75 JHeadSet.3@34.05,2.3
TWI-SCL: Core.18 P1.6 | length 24.5
  Top Layer w0.254: v1(27.275,17.775) 27.3,17.8 Core.18
  Bottom Layer w0.254: P1.6 15.175,7.025 25.925,17.775 v1(27.275,17.775)
TWI-SDA: Core.19 P1.5 | length 25.8
  Top Layer w0.254: v1(26.5,18.612) 31.388,18.612 Core.19
  Bottom Layer w0.254: P1.5 13.905,6.555 25.962,18.612 v1(26.5,18.612)
UCap: Core.6 CUSB.1 | length 4.2
  Top Layer w0.254: Core.6 25.75,10.1 27.775,8.075 CUSB.1
UD+: Core.4 RU+.2 | length 4
  Top Layer w0.254: Core.4 24.15,10.075 25.6,8.625 RU+.2
UD-: Core.3 RU-.2 | length 3.8
  Top Layer w0.254: Core.3 23.35,9.925 24.35,8.925 RU-.2
UGND: Core.5 CUSB.2 J1.5 LUGND.2 | length 21
  Top Layer w0.254: Core.5 24.95,10.15 26.75,8.35 v1(26.75,6.525)
  Top Layer w0.381: LUGND.2 17.45,11.2 v1(19.05,9.6) ; J1.5 26.3,5.4 26.75,5.85 v1(26.75,6.525) 27.75,6.525 CUSB.2
  Bottom Layer w0.381: v1(19.05,9.6) 22.125,6.525 v1(26.75,6.525) v1@26.75,6.625
UVBus: Core.7 F1.2 RLChg.2 TP4057.4 | length 33.3
  Top Layer w0.254: Core.7 26.55,10.425 27.775,9.2 v1(27.775,9.25)
  Top Layer w0.381: F1.2 v1(23.1,9.05) ; v1(27.775,9.25) 30.95,9.25 34.55,12.85 41.85,12.85 45.025,16.025 RLChg.2 TP4057.4
  Bottom Layer w0.381: v1(23.1,9.05) 23.3,9.25 v1(27.775,9.25)
VBat: CB1.2 HT7333.2 LBoost.2 REN.2 SWPower.2 SX1308.5 | length 38.2
  Top Layer w0.508: LBoost.2 1.525,48.95 2.1,49.525 3.1,49.525 ; SX1308.5 CB1.2 ; REN.2 CB1.2 ; SWPower.2 8.75,75.425 3.1,69.775 3.1,49.525 ; 3.1,49.525 4.15,49.525 4.625,49.05 CB1.2
VCC: CB2.2 Core.2 Core.14 Core.24 Core.34 Core.44 DB1.2 LED.2 P1.2 Q1.2 RDIRef.1 RFB1.2 RRST.1 SWLock.1 | length 185.4
  Top Layer w0.254: Core.14 35.175,14.6 35.475,14.9 RRST.1
  Top Layer w0.4: v1(30.225,38.1) RDIRef.1
  Top Layer w0.508: DB1.2 3.175,40.125 4.6,40.125 CB2.2 ; CB2.2@4.65,39.975 4.65,34.575 7.75,31.475 v1(16.625,31.475) ; P1.2 10.095,6.145 v1(12.25,8.3) 20.1,8.3 ; Core.44 20.1,8.3 ; Core.34 v1@20.1,27.965 ; v1(20.1,28.025) v1@20.1,27.965 ; Core.2 22.55,9.95 20.9,8.3 20.1,8.3 ; v1(26.1,33.965) v1@20.1,27.965 ; Core.24 28.95,30.8 30.225,32.075 v1(30.225,33.7) v1(30.225,38.1) ; v1(29.875,16.675) 29.875,15.218 30.493,14.6 Core.14 ; LED.2 35.35,67.725 v1(36.975,66.1) ; Q1.2 46.05,56.7 SWLock.1 46.1,54.225 v1(39.025,47.15) ; 39.575,56.75 v1(39.575,58.525)
  Bottom Layer w0.508: v1(12.25,8.3) 20.1,16.15 v1(20.1,28.025) 16.65,31.475 v1(16.625,31.475) ; v1(26.1,33.965) v1@30.23,38.095 ; v1(28.95,26.775) 29.875,25.85 v1(29.875,16.675) ; v1(30.225,33.7) 39.025,42.5 v1(39.025,47.15) ; v1(36.975,66.1) 39.575,63.5 v1(39.575,58.525)
VCC_3V: CDVcc1.1 CDVcc2.1 HT7333.3 OLED.9 RSDCSP.2 SD.4 | length 57.3
  Top Layer w0.254: 19.75,67.9 19.75,65.2 RSDCSP.2
  Top Layer w0.4: v1(20.301,47.827) 20.45,47.678 OLED.9
  Top Layer w0.508: HT7333.3 9,55.95 ; CDVcc1.1 15.25,55.95 ; CDVcc2.1 16.625,55.95 ; v1(18.85,55.95) 16.625,55.95 ; SD.4@24.85,66 24.85,67.025 23.975,67.9 19.75,67.9 14.525,67.9 9,62.375 9,55.95 ; 9,55.95 15.25,55.95 ; 15.25,55.95 16.625,55.95
  Bottom Layer w0.4: v1(18.85,55.95) 20.301,54.499 v1(20.301,47.827)
pads on no net: Core.8 Core.22 Core.33 Core.40 J1.0 J1.4 KeyRST.0 OLED.7 OLED.20 SD.0 SD.1 SD.8 SD.9 SWLock.0 SWLock.4 SWPower.0 SWSnd.0 SWSnd.4 SX1308.6 TP4057.5

## Silkscreen, mask and mechanical layers (free items; w line width, h text height)
Top Overlay:
  lines w0.1: 28.75,76.4 31.025,78.925
  lines w0.127: 45.01,13.8 45.985,13.8
  text "ArduMan / Alpha-1.1" at 1.9,10.225 h3.05
Bottom Overlay:
  circle w0.254: c3.5,3.5 r3.25
  circle w0.254: c46.5,3.5 r3.25
  circle w0.254: c46.5,77.5 r3.25
  circle w0.254: c3.5,77.5 r3.25
Border:
  the board outline again, w0.127

## Text inside footprints (layer, text, board x,y; h text height)
BAT: Top Overlay "+" at 44.027,15.36 h0.9 r90